# Altium PCB LPCB224R0__ASCII.PcbDoc
Units mm, origin at the board's own origin, x right, y up, seen from the top; angles counter-clockwise.
Board outline 139 x 166 mm, 4 copper layers (Top Layer, Internal Plane 1, Mid-Layer 1, Bottom Layer); 91 components, 73 nets, 403 pads, 4 vias.
Unrouted connection lines stored in the file: 212.
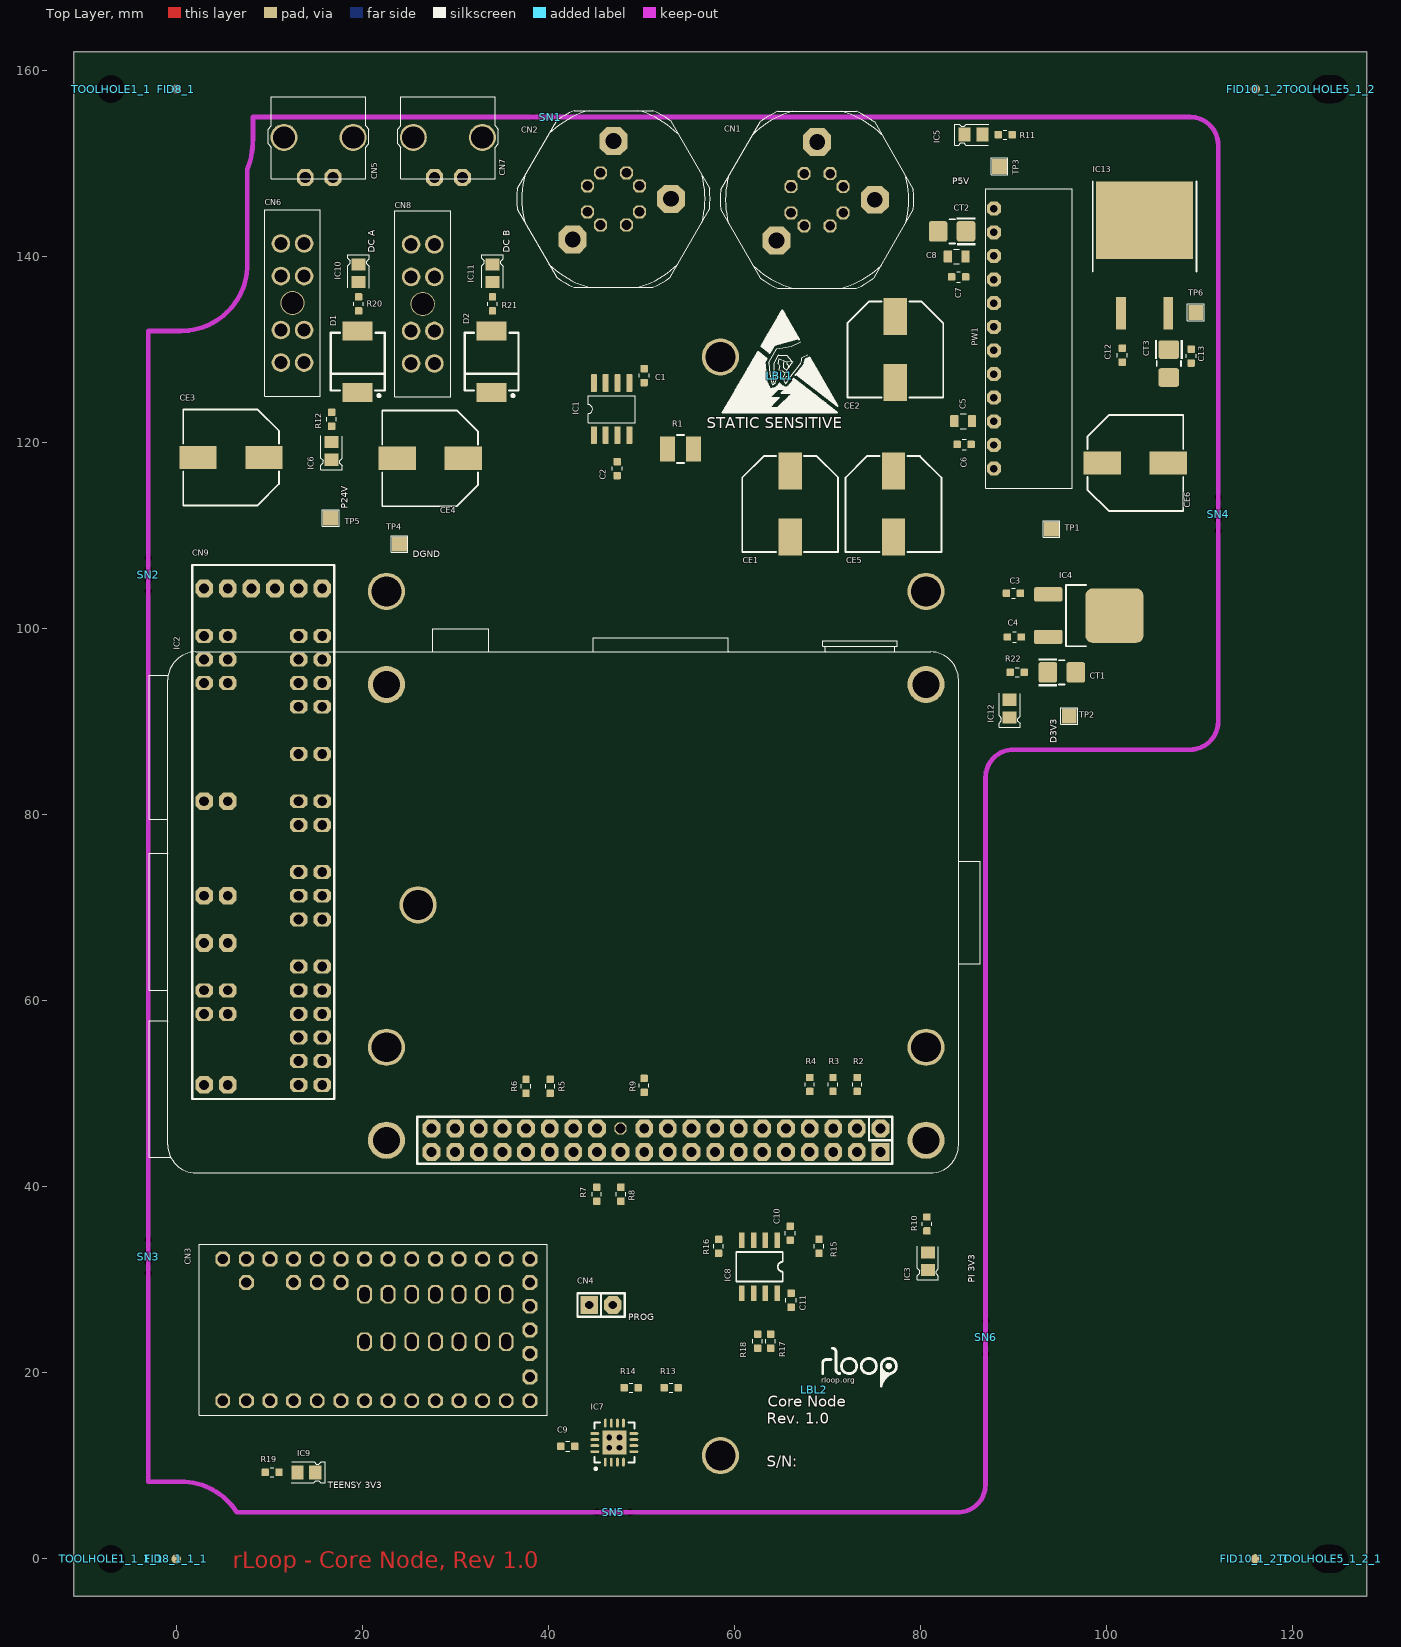
[diagram p0: Top Layer view]
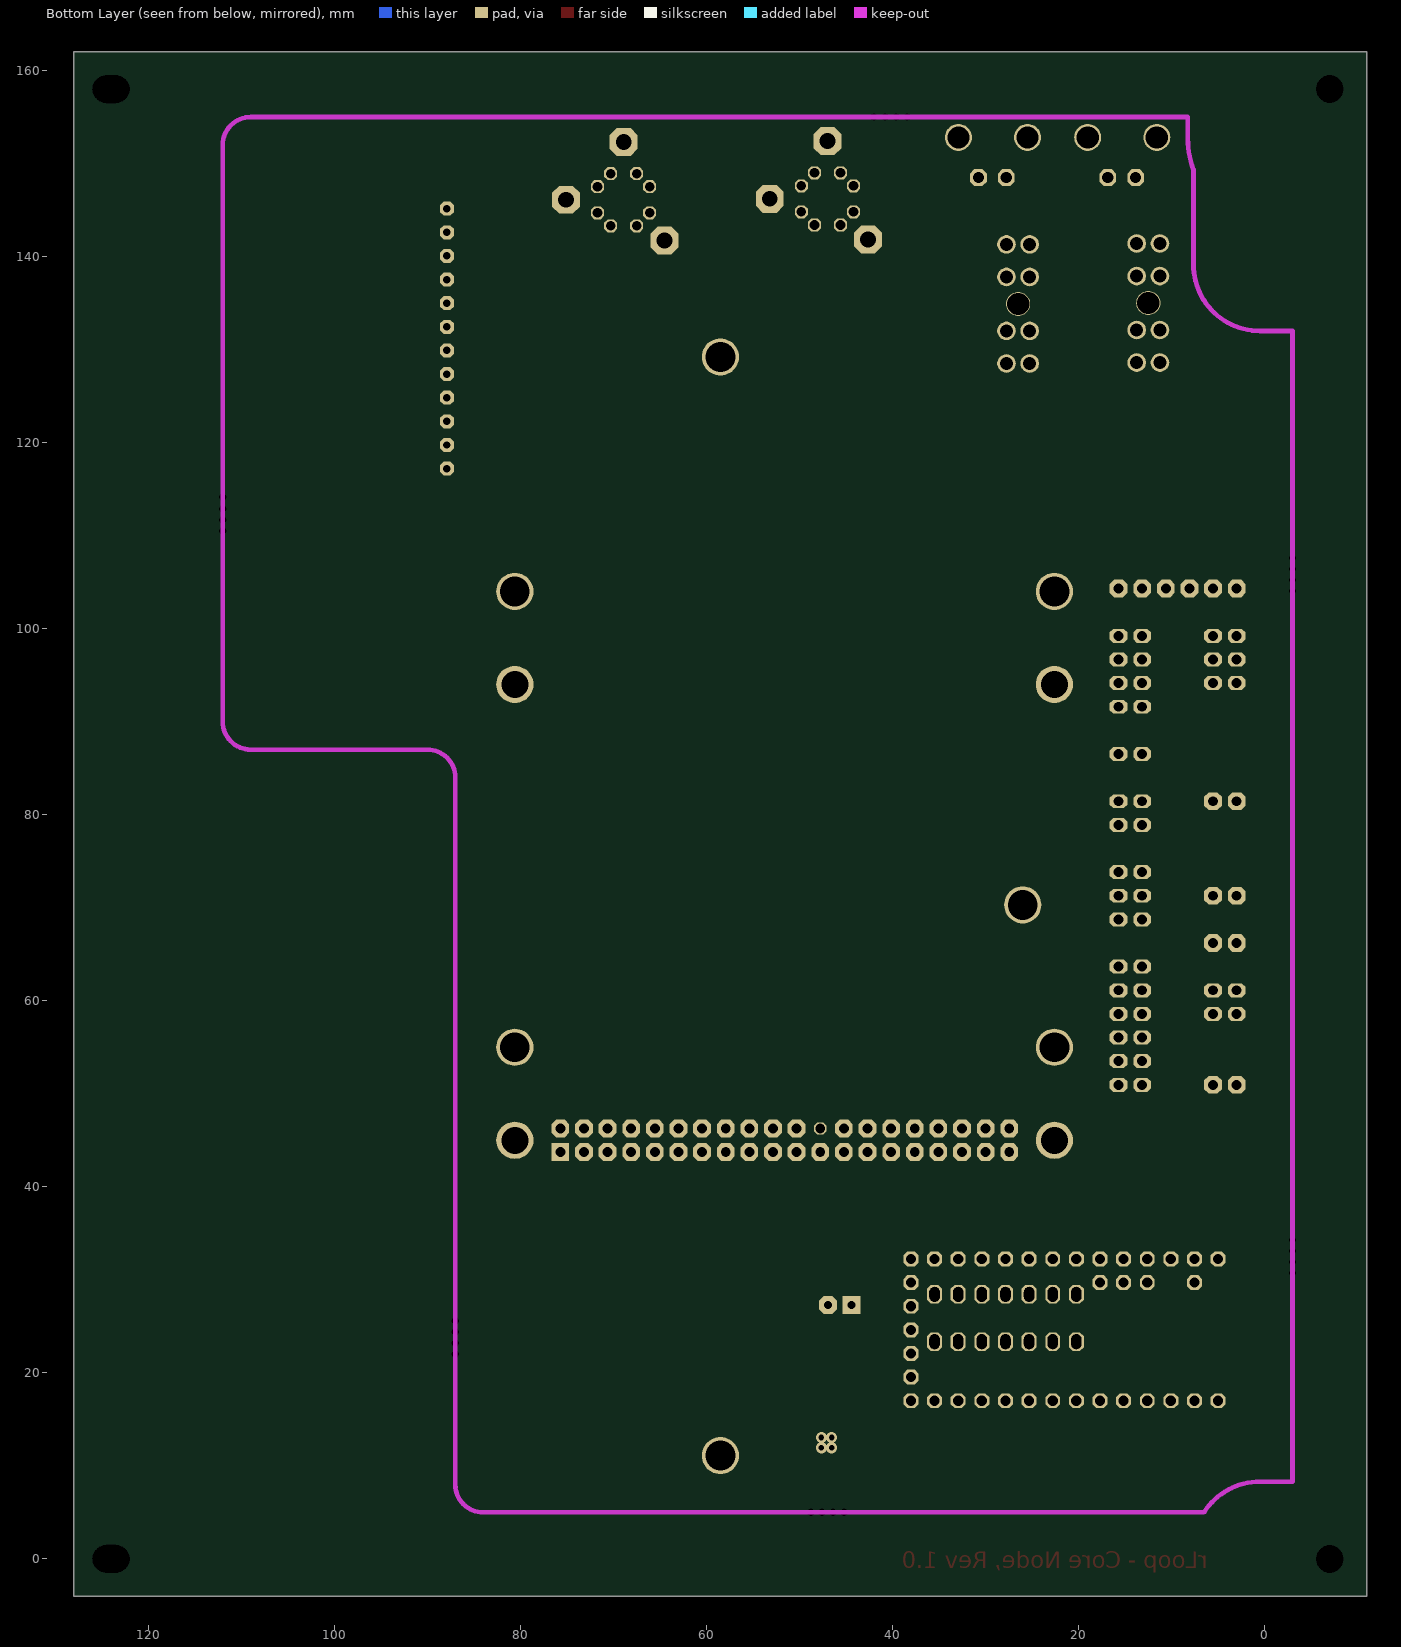
[diagram p1: Bottom Layer view, seen from below]
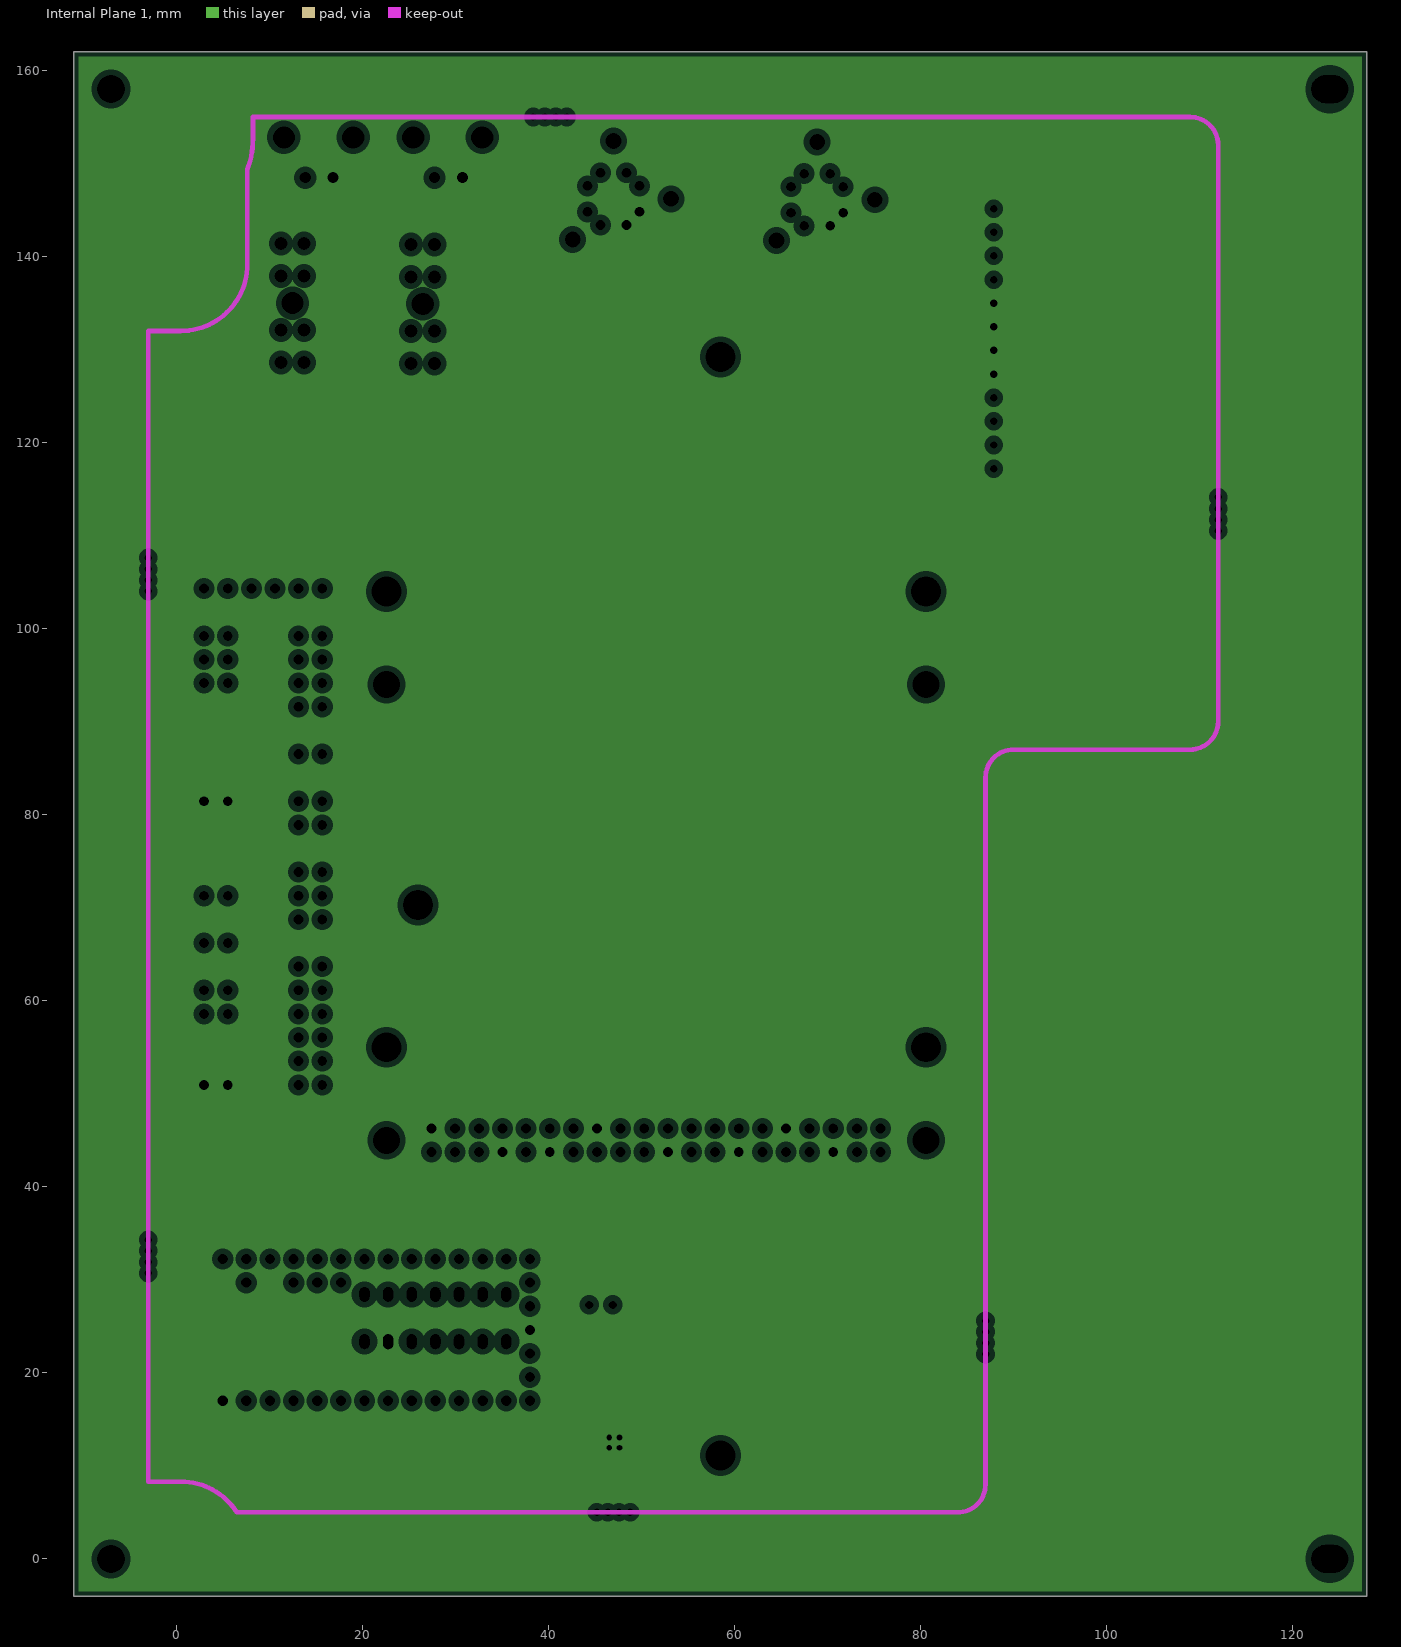
[diagram p2: Internal Plane 1, clearances drawn from the general rule]

## Layer stack, top to bottom
Top Layer: signal copper 0.0356
Dielectric: core 0.32, FR-4, Dk 4.8
Internal Plane 1: plane copper 0.0356, net DGND
Dielectric: prepreg 0.32, FR-4, Dk 4.8
Mid-Layer 1: signal copper 0.0356
Dielectric: core 0.32, FR-4, Dk 4.8
Bottom Layer: signal copper 0.0356

## Board outline
-11,-4 -11,162 128,162 128,-4

## Design rules (kind name [scope] priority, off if disabled: settings)
AssemblyTestPointUsage [All] p0: scope1count=1 scope1_0_kind=Board scope1_0_value=Board scope2count=1 scope2_0_kind=Board scope2_0_value=Board commentlength=0
AssemblyTestpoint [All] p0: scope1count=1 scope1_0_kind=Board scope1_0_value=Board scope2count=1 scope2_0_kind=Board scope2_0_value=Board commentlength=0
Clearance [All] p0: scope1count=1 scope1_0_kind=Board scope1_0_value=Board scope2count=1 scope2_0_kind=Board scope2_0_value=Board commentlength=0 gap=0.16
Clearance [All] p1: gap=0.16
ComponentClearance [All] p0: scope1count=1 scope1_0_kind=Board scope1_0_value=Board scope2count=1 scope2_0_kind=Board scope2_0_value=Board commentlength=0 gap=0.254 collisioncheckmode=3
DiffPairsRouting [All] p0: scope1count=1 scope1_0_kind=Board scope1_0_value=Board scope2count=1 scope2_0_kind=Board scope2_0_value=Board commentlength=0
FabricationTestPointUsage [All] p0: scope1count=1 scope1_0_kind=Board scope1_0_value=Board scope2count=1 scope2_0_kind=Board scope2_0_value=Board commentlength=0 valid=0 allowmultiple=FALSE
FabricationTestpoint [All] p0: scope1count=1 scope1_0_kind=Board scope1_0_value=Board scope2count=1 scope2_0_kind=Board scope2_0_value=Board commentlength=0 side=3 testpointundercomponent=TRUE minsize=1.016 maxsize=2.54 preferedsize=1.524 minholesize=0 maxholesize=1.016 preferedholesize=0.813 testpointgrid=0.025
FanoutControl Fanout_Default [All] p0: scope1count=1 scope1_0_kind=Board scope1_0_value=Board scope2count=1 scope2_0_kind=Board scope2_0_value=Board commentlength=30 // Fanout_Default (Default Rule)
FanoutControl Fanout_Small [All] p0 off: scope1count=1 scope1_0_kind=Board scope1_0_value=Board scope2count=1 scope2_0_kind=Board scope2_0_value=Board commentlength=84 // Protel DXP Scope 1 Expression Was: (CompPinCount < 5)   Fanout_Small (Default Rule)
FanoutControl Fanout_SOIC [All] p0 off: scope1count=1 scope1_0_kind=Board scope1_0_value=Board scope2count=1 scope2_0_kind=Board scope2_0_value=Board commentlength=71 // Protel DXP Scope 1 Expression Was: IsSOIC   Fanout_SOIC (Default Rule)
FanoutControl Fanout_LCC [All] p0 off: scope1count=1 scope1_0_kind=Board scope1_0_value=Board scope2count=1 scope2_0_kind=Board scope2_0_value=Board commentlength=69 // Protel DXP Scope 1 Expression Was: IsLCC   Fanout_LCC (Default Rule)
FanoutControl Fanout_BGA [All] p0 off: scope1count=1 scope1_0_kind=Board scope1_0_value=Board scope2count=1 scope2_0_kind=Board scope2_0_value=Board commentlength=69 // Protel DXP Scope 1 Expression Was: IsBGA   Fanout_BGA (Default Rule)
Height [All] p0: scope1count=1 scope1_0_kind=Board scope1_0_value=Board scope2count=1 scope2_0_kind=Board scope2_0_value=Board commentlength=0
HoleSize [All] p0: scope1count=1 scope1_0_kind=Board scope1_0_value=Board scope2count=1 scope2_0_kind=Board scope2_0_value=Board commentlength=0 absolutevalues=TRUE maxlimit=4 minlimit=0.025 maxpercent=80.000 minpercent=20.000
HoleSize [All] p1: absolutevalues=TRUE maxlimit=4 minlimit=0.025 maxpercent=80.000 minpercent=20.000
HoleToHoleClearance [All] p0: scope1count=1 scope1_0_kind=Board scope1_0_value=Board scope2count=1 scope2_0_kind=Board scope2_0_value=Board commentlength=0
LayerPairs [All] p0: scope1count=1 scope1_0_kind=Board scope1_0_value=Board scope2count=1 scope2_0_kind=Board scope2_0_value=Board commentlength=0 enforce=TRUE
MinimumSolderMaskSliver [All] p0 off: scope1count=1 scope1_0_kind=Board scope1_0_value=Board scope2count=1 scope2_0_kind=Board scope2_0_value=Board commentlength=0
MinimumSolderMaskSliver [All] p1 off: minsoldermaskwidth=0.1
NetAntennae [All] p0: scope1count=1 scope1_0_kind=Board scope1_0_value=Board scope2count=1 scope2_0_kind=Board scope2_0_value=Board commentlength=0
PasteMaskExpansion [All] p0: scope1count=1 scope1_0_kind=Board scope1_0_value=Board scope2count=1 scope2_0_kind=Board scope2_0_value=Board commentlength=0 expansion=0
PlaneClearance [All] p0: scope1count=1 scope1_0_kind=Board scope1_0_value=Board scope2count=1 scope2_0_kind=Board scope2_0_value=Board commentlength=0 clearance=0.6
PlaneClearance [All] p1: clearance=0.6
PlaneConnect [All] p0: scope1count=1 scope1_0_kind=Board scope1_0_value=Board scope2count=1 scope2_0_kind=Board scope2_0_value=Board commentlength=0 planeconnectstyle=Direct reliefexpansion=0.508 reliefentries=4 reliefconductorwidth=0.254 reliefairgap=0.254
PlaneConnect [All] p1: planeconnectstyle=Direct reliefexpansion=0.508 reliefentries=4 reliefconductorwidth=0.254 reliefairgap=0.254
PolygonConnect PolygonConnect_1 [All] p0: scope1count=1 scope1_0_kind=Board scope1_0_value=Board scope2count=1 scope2_0_kind=Board scope2_0_value=Board commentlength=0 connectstyle=Relief reliefconductorwidth=0.254 reliefentries=4 polygonreliefangle="90 Angle"
PolygonConnect [All] p0 off: scope1count=1 scope1_0_kind=Board scope1_0_value=Board scope2count=1 scope2_0_kind=Board scope2_0_value=Board commentlength=44 connectstyle=Direct reliefconductorwidth=0.254 reliefentries=4 polygonreliefangle="90 Angle" // Protel DXP Scope 1 Expression Was: isVia
PolygonConnect [isVia] p1: connectstyle=Direct reliefconductorwidth=0.254 reliefentries=4 polygonreliefangle="90 Angle" airgapwidth=0.254
PolygonConnect PolygonConnect_1 [All] p2: connectstyle=Relief reliefconductorwidth=0.254 reliefentries=4 polygonreliefangle="90 Angle" airgapwidth=0.254
RoomDefinition "LPCB224 - OVERVIEW" [All] p0: scope1count=1 scope1_0_kind=ComponentClass scope1_0_value="LPCB224 - OVERVIEW" scope2count=1 scope2_0_kind=Board scope2_0_value=Board commentlength=0 region_x1=0 region_y1=0 region_x2=20000000 region_y2=10000000 confinementstyle=ConfineIn
RoomDefinition "U_LPCB224 - PI" [All] p0: scope1count=1 scope1_0_kind=ComponentClass scope1_0_value="U_LPCB224 - PI" scope2count=1 scope2_0_kind=Board scope2_0_value=Board commentlength=0 region_x1=0 region_y1=0 region_x2=20000000 region_y2=10000000 confinementstyle=ConfineIn
RoomDefinition "U_LPCB224 - POWER INPUT" [All] p0: scope1count=1 scope1_0_kind=ComponentClass scope1_0_value="U_LPCB224 - POWER INPUT" scope2count=1 scope2_0_kind=Board scope2_0_value=Board commentlength=0 region_x1=0 region_y1=0 region_x2=20000000 region_y2=10000000 confinementstyle=ConfineIn
RoomDefinition "U_LPCB224 - CAN" [All] p0: scope1count=1 scope1_0_kind=ComponentClass scope1_0_value="U_LPCB224 - CAN" scope2count=1 scope2_0_kind=Board scope2_0_value=Board commentlength=0 region_x1=0 region_y1=0 region_x2=20000000 region_y2=10000000 confinementstyle=ConfineIn
RoomDefinition "U_LPCB224 - PSU" [All] p0: scope1count=1 scope1_0_kind=ComponentClass scope1_0_value="U_LPCB224 - PSU" scope2count=1 scope2_0_kind=Board scope2_0_value=Board commentlength=0 region_x1=0 region_y1=0 region_x2=20000000 region_y2=10000000 confinementstyle=ConfineIn
RoomDefinition "U_LPCB224 - TEENSY" [All] p0: scope1count=1 scope1_0_kind=ComponentClass scope1_0_value="U_LPCB224 - TEENSY" scope2count=1 scope2_0_kind=Board scope2_0_value=Board commentlength=0 region_x1=0 region_y1=0 region_x2=20000000 region_y2=10000000 confinementstyle=ConfineIn
RoomDefinition "U_LPCB224 - CORE CONNECTOR" [All] p0: scope1count=1 scope1_0_kind=ComponentClass scope1_0_value="U_LPCB224 - CORE CONNECTOR" scope2count=1 scope2_0_kind=Board scope2_0_value=Board commentlength=0 region_x1=0 region_y1=0 region_x2=20000000 region_y2=10000000 confinementstyle=ConfineIn
RoomDefinition "LPCB224 - OVERVIEW" [InComponentClass('LPCB224 - OVERVIEW')] p1: confinementstyle=ConfineIn formatcopy=TRUE lockcomponents=FALSE outline -79.611,-125.874 -28.811,-125.874 -28.811,-100.474 -79.611,-100.474
RoomDefinition "U_LPCB224 - CORE CONNECTOR" [InComponentClass('U_LPCB224 - CORE CONNECTOR')] p2: confinementstyle=ConfineIn formatcopy=TRUE lockcomponents=FALSE outline -79.611,-125.874 -28.811,-125.874 -28.811,-100.474 -79.611,-100.474
RoomDefinition "U_LPCB224 - TEENSY" [InComponentClass('U_LPCB224 - TEENSY')] p3: confinementstyle=ConfineIn formatcopy=TRUE lockcomponents=FALSE outline -79.611,-125.874 -28.811,-125.874 -28.811,-100.474 -79.611,-100.474
RoomDefinition "U_LPCB224 - PSU" [InComponentClass('U_LPCB224 - PSU')] p4: confinementstyle=ConfineIn formatcopy=TRUE lockcomponents=FALSE outline -79.611,-125.874 -28.811,-125.874 -28.811,-100.474 -79.611,-100.474
RoomDefinition "U_LPCB224 - PI" [InComponentClass('U_LPCB224 - PI')] p5: confinementstyle=ConfineIn formatcopy=TRUE lockcomponents=FALSE outline -79.611,-125.874 -28.811,-125.874 -28.811,-100.474 -79.611,-100.474
RoomDefinition "U_LPCB224 - POWER INPUT" [InComponentClass('U_LPCB224 - POWER INPUT')] p6: confinementstyle=ConfineIn formatcopy=TRUE lockcomponents=FALSE outline -79.611,-125.874 -28.811,-125.874 -28.811,-100.474 -79.611,-100.474
RoomDefinition "U_LPCB224 - CAN" [InComponentClass('U_LPCB224 - CAN')] p7: confinementstyle=ConfineIn formatcopy=TRUE lockcomponents=FALSE outline -79.611,-125.874 -28.811,-125.874 -28.811,-100.474 -79.611,-100.474
RoutingCorners [All] p0: scope1count=1 scope1_0_kind=Board scope1_0_value=Board scope2count=1 scope2_0_kind=Board scope2_0_value=Board commentlength=0 cornerstyle=45-Degree minsetback=2.54 maxsetback=2.54
RoutingLayers [All] p0: scope1count=1 scope1_0_kind=Board scope1_0_value=Board scope2count=1 scope2_0_kind=Board scope2_0_value=Board commentlength=0 top layer=Automatic mid layer 1=Automatic bottom layer=Automatic
RoutingPriority [All] p0: scope1count=1 scope1_0_kind=Board scope1_0_value=Board scope2count=1 scope2_0_kind=Board scope2_0_value=Board commentlength=0
RoutingTopology [All] p0: scope1count=1 scope1_0_kind=Board scope1_0_value=Board scope2count=1 scope2_0_kind=Board scope2_0_value=Board commentlength=0 topology=Shortest
RoutingVias [All] p0: scope1count=1 scope1_0_kind=Board scope1_0_value=Board scope2count=1 scope2_0_kind=Board scope2_0_value=Board commentlength=0 holewidth=0.6 width=1.2 viastyle="Through Hole" minholewidth=0.6 minwidth=1.2 maxholewidth=1 maxwidth=3
RoutingVias [All] p1: holewidth=0.6 width=1.2 viastyle="Through Hole" minholewidth=0.6 minwidth=1.2 maxholewidth=1 maxwidth=3
ShortCircuit [All] p0: scope1count=1 scope1_0_kind=Board scope1_0_value=Board scope2count=1 scope2_0_kind=Board scope2_0_value=Board commentlength=0 allowed=FALSE
SilkToSilkClearance [All] p0 off: scope1count=1 scope1_0_kind=Board scope1_0_value=Board scope2count=1 scope2_0_kind=Board scope2_0_value=Board commentlength=0
SilkToSilkClearance [All] p1 off: silktosilkclearance=0.1
SilkToSolderMaskClearance [All] p0 off: scope1count=1 scope1_0_kind=Board scope1_0_value=Board scope2count=1 scope2_0_kind=Board scope2_0_value=Board commentlength=44 // Protel DXP Scope 1 Expression Was: IsPad
SilkToSolderMaskClearance [IsPad] p1 off: minsilkscreentomaskgap=0.1 clearancetoexposedcopper=TRUE
SolderMaskExpansion [All] p0: scope1count=1 scope1_0_kind=Board scope1_0_value=Board scope2count=1 scope2_0_kind=Board scope2_0_value=Board commentlength=0 expansion=0.102
SolderMaskExpansion [All] p1: expansion=0.102
UnRoutedNet [All] p0: scope1count=1 scope1_0_kind=Board scope1_0_value=Board scope2count=1 scope2_0_kind=Board scope2_0_value=Board commentlength=0
Width [All] p0: scope1count=1 scope1_0_kind=Board scope1_0_value=Board scope2count=1 scope2_0_kind=Board scope2_0_value=Board commentlength=0 maxlimit=2 minlimit=0.254 preferedwidth=0.254
Width [All] p1: maxlimit=2 minlimit=0.254 preferedwidth=0.254
22 further rules are at their usual default settings.

## Classes and differential pairs
component class "U_LPCB224 - POWER INPUT": CE3 CE4 CN5 CN6 CN7 CN8 D1 D2 IC10 IC11 R20 R21
component class "U_LPCB224 - TEENSY": C9 C10 C11 CN3 CN4 IC7 IC8 IC9 R13 R14 R15 R16 R17 R18 R19
component class "U_LPCB224 - PSU": C3 C4 C5 C6 C7 C8 C12 C13 CE1 CE2 CE5 CE6 CT1 CT2 CT3 IC4 IC5 IC6 IC12 IC13 PW1 R11 R12 R22 TP1 TP2 TP3 TP4 TP5 TP6
component class "U_LPCB224 - PI": IC2 IC3 R2 R3 R4 R5 R6 R7 R8 R9 R10
component class "U_LPCB224 - CAN": C1 C2 CN1 CN2 IC1 R1
component class "U_LPCB224 - CORE CONNECTOR": CN9
component class "LPCB224 - OVERVIEW": LBL1 LBL2 SN1 SN2 SN3 SN4 SN5 SN6

## Components (designator, comment, footprint, x,y, rotation, side; value= is the part's Value field where it differs from the comment)
C1 "100n / 50V / 10% / SMD 0603" LFP011__CC1608-0603-IPC7351_B 50.3,127.205 r90 top
C2 "100n / 50V / 10% / SMD 0603" LFP011__CC1608-0603-IPC7351_B 47.4,117.205 r270 top
C3 "100n / 50V / 10% / SMD 0603" LFP011__CC1608-0603-IPC7351_B 90,103.805 r180 top
C4 "100n / 50V / 10% / SMD 0603" LFP011__CC1608-0603-IPC7351_B 90.1,99.105 r180 top
C5 "1uF / 50V / 10% / SMD 0805" LFP010__CC2012-0805-IPC7351_B 84.6,122.305 r180 top
C6 "100n / 50V / 10% / SMD 0603" LFP011__CC1608-0603-IPC7351_B 84.7,119.805 r180 top
C7 "100n / 50V / 10% / SMD 0603" LFP011__CC1608-0603-IPC7351_B 84.1,137.805 r180 top
C8 "1uF / 50V / 10% / SMD 0805" LFP010__CC2012-0805-IPC7351_B 83.9,140.005 r180 top
C9 "100n / 50V / 10% / SMD 0603" LFP011__CC1608-0603-IPC7351_B 42.1,12.105 r180 top
C10 "100n / 50V / 10% / SMD 0603" LFP011__CC1608-0603-IPC7351_B 66,35.005 r90 top
C11 "100n / 50V / 10% / SMD 0603" LFP011__CC1608-0603-IPC7351_B 66.1,27.805 r270 top
C12 "100n / 50V / 10% / SMD 0603" LFP011__CC1608-0603-IPC7351_B 101.7,129.4 r270 top
C13 "100n / 50V / 10% / SMD 0603" LFP011__CC1608-0603-IPC7351_B 109.1,129.3 r270 top
CE1 "330uF / 35V / 20% / SMD 10x10" LFP041__NICHICON_WT_10X10 66,113.405 r270 top
CE2 "330uF / 35V / 20% / SMD 10x10" LFP041__NICHICON_WT_10X10 77.3,130.005 r270 top
CE3 "330uF / 35V / 20% / SMD 10x10" LFP041__NICHICON_WT_10X10 5.9,118.405 r180 top
CE4 "330uF / 35V / 20% / SMD 10x10" LFP041__NICHICON_WT_10X10 27.3,118.305 r180 top
CE5 "330uF / 35V / 20% / SMD 10x10" LFP041__NICHICON_WT_10X10 77.1,113.405 r270 top
CE6 "330uF / 35V / 20% / SMD 10x10" LFP041__NICHICON_WT_10X10 103.1,117.8 r0 top
CN1 "2232331-1" 2232331-1 68.9,146.105 r0 top locked
CN2 "2232331-1" 2232331-1 47,146.205 r0 top locked
CN3 "TEENSY_V3.2" TEENSY_V3.2 5,17 r90 top locked
CN4 "HDR-2X1" HDR-2X1 44.4,27.3 r0 top
CN5 "1445054-2" 1445054-2 15.3,152.805 r180 top
CN6 "SI-H-FKS 30" SI-H-FKS-30 12.5,135.005 r90 top
CN7 "1445054-2" 1445054-2 29.2,152.805 r180 top
CN8 "SI-H-FKS 30" SI-H-FKS-30 26.5,134.905 r90 top
CN9 "RLOOP_NODE_CORE" RLOOP_NODE_CORE 3,104.305 r270 top locked
CT1 "22uF / 16V / 10% / SMD TC3528" LFP018__TC3528 95.2,95.305 r0 top
CT2 "22uF / 16V / 10% / SMD TC3528" LFP018__TC3528 83.4,142.705 r180 top
CT3 "22uF / 16V / 10% / SMD TC3528" LFP018__TC3528 106.7,128.5 r270 top
D1 "S3M-E3/57T" LFP040__DO-214AB 19.5,128.705 r90 top
D2 "S3M-E3/57T" LFP040__DO-214AB 33.9,128.705 r90 top
FID8_1 "FIDUCIAL" FIDTOP 0,158 r0 top
FID8_1_1_1 "FIDUCIAL" FIDTOP 0,0 r0 top
FID10_1_2 "FIDUCIAL" FIDTOP 116,158 r0 top
FID10_1_2_1 "FIDUCIAL" FIDTOP 116,0 r0 top
IC1 "MCP2562T-E/SN" LFP017__SO-G8/Y1.9 46.8,123.605 r0 top
IC2 "RASPBERRY_PI_B" RASPBERRY_PI_B 80.6,45 r180 top locked
IC3 "EL-17-21VGC/TR8" CR2012-0805-LED 80.8,32.005 r90 top
IC4 "NCV4274DT33RKG" LFP019__369A-13 98.3,101.405 r270 top
IC5 "EL-17-21VGC/TR8" CR2012-0805-LED 85.705,153.1 r0 top
IC6 "EL-17-21VGC/TR8" CR2012-0805-LED 16.7,119.105 r90 top
IC7 "TSYS01" LFP135__QFN65P400X400X80_HS-17M 47.1,12.5 r0 top
IC8 "ISO1540DR" LFP097__SOIC150-8 62.7,31.405 r180 top
IC9 "EL-17-21VGC/TR8" CR2012-0805-LED 14,9.305 r180 top
IC10 "EL-17-21VGC/TR8" CR2012-0805-LED 19.6,138.205 r270 top
IC11 "EL-17-21VGC/TR8" CR2012-0805-LED 34,138.205 r270 top
IC12 "EL-17-21VGC/TR8" CR2012-0805-LED 89.6,91.405 r90 top
IC13 "NCV8674DS120G" LFP082__D2PAK 104.1,138.4 r0 top
LBL1 "STATIC LABEL" STATIC_LABEL 64.9,127.2 r0 top
LBL2 "RLOOP_LOGO" RLOOP_LOGO 68.6,18.205 r0 top
PW1 "R-625.0P" R-625.0P 87.9,117.205 r90 top locked
R1 "121R / 0.33W / 1% / SMD 1210" LFP028__CR3225-1210 54.2,119.305 r0 top
R2 "10K / 0.1W / 1% / SMD 0603" LFP020__CR1608-0603-IPC7351_B 73.2,51 r270 top
R3 "10K / 0.1W / 1% / SMD 0603" LFP020__CR1608-0603-IPC7351_B 70.6,51 r270 top
R4 "10K / 0.1W / 1% / SMD 0603" LFP020__CR1608-0603-IPC7351_B 68.1,51 r270 top
R5 "10K / 0.1W / 1% / SMD 0603" LFP020__CR1608-0603-IPC7351_B 40.2,50.8 r270 top
R6 "10K / 0.1W / 1% / SMD 0603" LFP020__CR1608-0603-IPC7351_B 37.6,50.8 r270 top
R7 "10K / 0.1W / 1% / SMD 0603" LFP020__CR1608-0603-IPC7351_B 45.2,39.2 r90 top
R8 "10K / 0.1W / 1% / SMD 0603" LFP020__CR1608-0603-IPC7351_B 47.8,39.2 r90 top
R9 "10K / 0.1W / 1% / SMD 0603" LFP020__CR1608-0603-IPC7351_B 50.3,50.9 r270 top
R10 "2.2K / 0.1W / 1% / SMD 0603" LFP020__CR1608-0603-IPC7351_B 80.7,36.005 r90 top
R11 "2.2K / 0.1W / 1% / SMD 0603" LFP020__CR1608-0603-IPC7351_B 89.105,153.1 r0 top
R12 "2.2K / 0.1W / 1% / SMD 0603" LFP020__CR1608-0603-IPC7351_B 16.7,122.505 r90 top
R13 "2.2K / 0.1W / 1% / SMD 0603" LFP020__CR1608-0603-IPC7351_B 53.2,18.405 r0 top
R14 "2.2K / 0.1W / 1% / SMD 0603" LFP020__CR1608-0603-IPC7351_B 48.9,18.405 r180 top
R15 "2.2K / 0.1W / 1% / SMD 0603" LFP020__CR1608-0603-IPC7351_B 69.1,33.605 r90 top
R16 "2.2K / 0.1W / 1% / SMD 0603" LFP020__CR1608-0603-IPC7351_B 58.3,33.605 r90 top
R17 "2.2K / 0.1W / 1% / SMD 0603" LFP020__CR1608-0603-IPC7351_B 63.9,23.405 r270 top
R18 "2.2K / 0.1W / 1% / SMD 0603" LFP020__CR1608-0603-IPC7351_B 62.5,23.405 r270 top
R19 "2.2K / 0.1W / 1% / SMD 0603" LFP020__CR1608-0603-IPC7351_B 10.3,9.305 r180 top
R20 "2.2K / 0.1W / 1% / SMD 0603" LFP020__CR1608-0603-IPC7351_B 19.6,134.905 r270 top
R21 "2.2K / 0.1W / 1% / SMD 0603" LFP020__CR1608-0603-IPC7351_B 34,134.905 r270 top
R22 "2.2K / 0.1W / 1% / SMD 0603" LFP020__CR1608-0603-IPC7351_B 90.4,95.305 r0 top
SN1 "PCB_SNAPOUT" SNAPOUT_NEW 42,155 r180 top
SN2 "PCB_SNAPOUT" SNAPOUT_NEW -3,104.005 r90 top
SN3 "PCB_SNAPOUT" SNAPOUT_NEW -3,30.705 r90 top
SN4 "PCB_SNAPOUT" SNAPOUT_NEW 112,110.505 r90 top
SN5 "PCB_SNAPOUT" SNAPOUT_NEW 48.8,5 r180 top
SN6 "PCB_SNAPOUT" SNAPOUT_NEW 87,22.005 r90 top
TOOLHOLE1_1 "Comment" TOOL-1#1 -7,158 r0 top
TOOLHOLE1_1_1_1 "Comment" TOOL-1#1 -7,0 r0 top
TOOLHOLE5_1_2 "Comment" TOOL-1#2 124,158 r0 top
TOOLHOLE5_1_2_1 "Comment" TOOL-1#2 124,0 r0 top
TP1 "SMD_TP" SMD-TP 94.1,110.7 r90 top
TP2 "SMD_TP" SMD-TP 96,90.605 r0 top
TP3 "SMD_TP" SMD-TP 88.505,149.7 r0 top
TP4 "SMD_TP" SMD-TP 24,109.105 r90 top
TP5 "SMD_TP" SMD-TP 16.6,111.905 r90 top
TP6 "SMD_TP" SMD-TP 109.6,134 r90 top

## Footprints (in the part's own frame and the unit in brackets; to place one, negate y for a bottom-side part, rotate by r counter-clockwise, add the part's x,y. Pads: shape width x height; smd on the part's side, far side on the other; paste and mask are expansions set on the pad)
1445054-2 [mm]
  oct 1.8x1.8 hole 1.2: 1(1.435,4.32) 2(-1.565,4.32)
  round 2.9 hole 2.4: B(-3.715,0) B(3.715,0)
  silkscreen extent -5.4,-4.36 5.4,4.46
2232331-1 [mm]
  oct 1.4x1.4 hole 1.05: 1(-1.4,-2.8) 2(-2.8,-1.4) 3(-2.8,1.4) 4(-1.4,2.8) 5(1.4,2.8) 6(2.8,1.4) 7(2.8,-1.4) 8(1.4,-2.8)
  oct 3x3 hole 1.7: B(-4.38,-4.38) B(0,6.2) B(6.2,0)
  silkscreen extent -10.41,-9.51 10.39,9.49
CR2012-0805-LED [mm]
  rect 1.3x1.5 smd: A(0.95,0) K(-0.95,0)
  silkscreen extent -2.01,-1.14 1.63,1.14
FIDTOP [mil]
  round 40 smd mask+39.37: 1(0,0)
HDR-2X1 [mil] "2-Pin connector"
  rect 75x75 hole 35: 1(0,0)
  oct 75x75 hole 35: 2(100,0)
  silkscreen extent -50,-50 150,50
LFP010__CC2012-0805-IPC7351_B [mm]
  rrect25% 0.9x1.3 smd paste-0.01: 1(-0.95,0) 2(0.95,0)
  silkscreen extent -0.3,-0.8 0.3,0.8
LFP011__CC1608-0603-IPC7351_B [mm]
  rrect25% 0.8x0.8 smd: 1(-0.75,0) 2(0.75,0)
  silkscreen extent -0.2,-0.55 0.2,0.55
LFP017__SO-G8/Y1.9 [mm]
  rrect25% 0.65x1.9 smd: 1(-1.905,-2.8) 2(-0.635,-2.8) 3(0.635,-2.8) 4(1.905,-2.8) 5(1.905,2.8) 6(0.635,2.8) 7(-0.635,2.8) 8(-1.905,2.8)
  silkscreen extent -2.52,-1.45 2.52,1.45
LFP018__TC3528 [mm]
  rrect25% 2x2.2 smd: 1(-1.5,0) 2(1.5,0)
  silkscreen extent -2.51,-1.5 0.3,1.5
LFP019__369A-13 [mil]
  rrect25% 60x120 smd: 1(-90,-179.49) 3(90,-179.49)
  rrect25% 230x245 smd paste-196.85: 4(0,100.75)
  silkscreen extent -130,-104 130,-19
LFP020__CR1608-0603-IPC7351_B [mm]
  rrect25% 0.8x0.8 smd: 1(-0.75,0) 2(0.75,0)
  silkscreen extent -0.2,-0.5 0.2,0.5
LFP028__CR3225-1210 [mm]
  rect 1.6x2.7 smd: 1(-1.4,0) 2(1.4,0)
  silkscreen extent -0.4,-1.5 0.4,1.5
LFP040__DO-214AB [mm]
  rect 2.032x3.2 smd: 1(-3.3,0) 2(3.3,0)
  silkscreen extent -3.8,-2.9 3.1,2.9
LFP041__NICHICON_WT_10X10 [mm]
  rect 4x2.5 smd: 1(-3.55,0) 2(3.55,0)
  silkscreen extent -5.15,-5.15 5.15,5.15
LFP082__D2PAK [mm] "D2-PAK/TO-263-AB; 3 Leads (1 Cropped); Body 15.5 (inc. leads) x 10.5 mm (LxW max)"
  rect 1.05x3.5 smd: 1(-2.54,-4.5) 3(2.54,-4.5)
  rect 10.4x8.38 smd paste-1: 2(0,5.5)
  silkscreen extent -5.58,0 5.58,9.7
LFP097__SOIC150-8 [mm] "Small Outline, Plastic, Narrow; 8 Leads; Body Width 3.8 mm; Pitch 1.27 mm"
  rrect10% 0.6x1.7 smd paste-0.05: 1(-1.905,-2.85) 2(-0.635,-2.85) 3(0.635,-2.85) 4(1.905,-2.85) 5(1.905,2.85) 6(0.635,2.85) 7(-0.635,2.85) 8(-1.905,2.85)
  silkscreen extent -2.5,-1.6 2.5,1.6
LFP135__QFN65P400X400X80_HS-17M [mm] "QFN, 16-Leads, Body 4.00x4.00mm, Pitch 0.65mm, Thermal Pad 2.60x2.60mm, IPC Low Density"
  oval 0.3x0.95 smd paste-0.05: 1(-0.975,-2.1) 2(-0.325,-2.1) 3(0.325,-2.1) 4(0.975,-2.1) 9(0.975,2.1) 10(0.325,2.1) 11(-0.325,2.1) 12(-0.975,2.1)
  oval 0.95x0.3 smd paste-0.05: 5(2.1,-0.975) 6(2.1,-0.325) 7(2.1,0.325) 8(2.1,0.975) 13(-2.1,0.975) 14(-2.1,0.325) 15(-2.1,-0.325) 16(-2.1,-0.975)
  rect 2.6x2.6 smd paste-5: PAD(0,0)
  silkscreen extent -2.15,-2.92 2.15,2.15
R-625.0P [mm]
  oct 1.5x1.5 hole 0.8: 1(0,0) 2(2.54,0) 3(5.08,0) 4(7.62,0) 5(10.16,0) 6(12.7,0) 7(15.24,0) 8(17.78,0) 9(20.32,0) 10(22.86,0) 11(25.4,0) 12(27.94,0)
  silkscreen extent -2.13,-8.4 30.07,0.9
RASPBERRY_PI_B [mm]
  oct 1.905x1.905 hole 1.067: 1(4.89,-1.27) 3(7.43,-1.27) 4(7.43,1.27) 5(9.97,-1.27) 6(9.97,1.27) 7(12.51,-1.27) 8(12.51,1.27) 9(15.05,-1.27) 10(15.05,1.27) 11(17.59,-1.27) 12(17.59,1.27) 13(20.13,-1.27) 14(20.13,1.27) 15(22.67,-1.27) 16(22.67,1.27) 17(25.21,-1.27) 18(25.21,1.27) 19(27.75,-1.27) 20(27.75,1.27) 21(30.29,-1.27) 22(30.29,1.27) 24(32.83,1.27) 25(35.37,-1.27) 26(35.37,1.27) 27(37.91,-1.27) 28(37.91,1.27) 29(40.45,-1.27) 30(40.45,1.27) 31(42.99,-1.27) 32(42.99,1.27) 33(45.53,-1.27) 34(45.53,1.27) 35(48.07,-1.27) 36(48.07,1.27) 37(50.61,-1.27) 38(50.61,1.27) 39(53.15,-1.27) 40(53.15,1.27)
  rect 1.905x1.905 hole 1.067: 2(4.89,1.27)
  oct 1.3x1.3 hole 1.067: 23(32.83,-1.27)
  round 4 hole 2.9: B(0,0) B(0,-49) B(58,0) B(58,-49)
  silkscreen extent -5.83,-55 83.5,3.5
RLOOP_LOGO [mm]
  silkscreen extent 0.89,0.39 8.82,4.45
RLOOP_NODE_CORE [mil]
  oct 59.06x75 hole 42: A10(200,0) A11(200,100) A12(300,0) A13(300,100) A14(400,0) AGND(400,100) ID1(200,400) ID2(200,500) ID3(300,400) ID4(500,500) ID5(500,400) ID6(400,500) ID7(400,400) ID8(300,500) SCL(700,500) SDA(700,400) T0(900,400) T1(900,500) T2(1000,400) T5(1000,500) T6(1200,400) T7(1200,500) T8(1300,400) T9(1300,500) T10(1400,400) T11(1400,500) T14(1600,400) T15(1600,500) T16(1700,400) T17(1700,500) T20(1800,400) T21(1800,500) T22(1900,400) T23(1900,500) T24(2000,400) T25(2000,500) T26(2100,400) T27(2100,500) T28(1700,0) T31(1700,100) T32(1800,0) T33(1800,100)
  oct 75x75 hole 42: D3V31(1300,0) D3V32(1300,100) D12V1(0,300) D12V2(0,200) GND1(2100,100) GND2(2100,0) GND3(900,100) GND4(900,0) P5V1(0,0) P5V2(0,100) P24V1(0,400) P24V2(0,500) T12(1500,0) T13(1500,100)
  silkscreen extent -100,-50 2160,550
SI-H-FKS-30 [mm] "Connector, Blade Fuse Holder, 5mm Terminals, 30A Max, PTH"
  round 2 hole 1.4: 1(2.9,-1.25) 1(2.9,1.25) 1(6.4,-1.25) 1(6.4,1.25) 2(-6.4,-1.25) 2(-6.4,1.25) 2(-2.9,-1.25) 2(-2.9,1.25)
  round 2.6 hole 2.4: B(0,0)
  silkscreen extent -10,-3 10,3
SMD-TP [mm]
  rect 1.6x1.6 smd paste-2: 1(0,0)
  silkscreen extent -0.9,-0.9 0.9,0.9
SNAPOUT_NEW [mm]
  round 0.4 hole 0.8 unplated: 0(0,0) 0(1.2,0) 0(2.4,0) 0(3.6,0)
STATIC_LABEL [mm]
  silkscreen extent -6.16,-3.95 6.18,7.02
TEENSY_V3.2 [mm]
  oct 1.6x1.6 hole 1.1: 0(0,-2.54) 1(0,-5.08) 2(0,-7.62) 3(0,-10.16) 3V3_1(15.24,-5.08) 3V3_2(5.08,-33.02) 4(0,-12.7) 5(0,-15.24) 6(0,-17.78) 7(0,-20.32) 8(0,-22.86) 9(0,-25.4) 10(0,-27.94) 11(0,-30.48) 12(0,-33.02) 13(15.24,-33.02) 14(15.24,-30.48) 15(15.24,-27.94) 16(15.24,-25.4) 17(15.24,-22.86) 18(15.24,-20.32) 19(15.24,-17.78) 20(15.24,-15.24) 21(15.24,-12.7) 22(15.24,-10.16) 23(15.24,-7.62) A10(12.7,-10.16) A11(12.7,-12.7) A14(12.7,-33.02) AGND(15.24,-2.54) AREF(12.7,-7.62) GND1(0,0) GND3(7.62,-33.02) PROG(10.16,-33.02) VBATT(2.54,-33.02) VIN(15.24,0) VUSB(12.7,-2.54)
  oct 2x1.6 hole 1.1 slot 1.6 at 0 deg: 3V3_3(11.43,-17.78) 24(6.35,-20.32) 25(6.35,-22.86) 26(6.35,-25.4) 27(6.35,-27.94) 28(6.35,-30.48) 29(11.43,-30.48) 30(11.43,-27.94) 31(11.43,-25.4) 32(11.43,-22.86) 33(11.43,-20.32) A12(6.35,-15.24) A13(11.43,-15.24) GND2(6.35,-17.78)
  silkscreen extent -1.58,-34.9 16.82,2.54
TOOL-1#1 [mm]
  round 2.54 hole 3 unplated: TOOL(0,0)
TOOL-1#2 [mm]
  round 0.076 hole 3 slot 4 at 0 deg unplated: TOOL1(0,0)

## Part data
C1 C2 C3 C4 C6 C7 C9 C10 C11 C12 C13: "Capacitor, Ceramic Chip, 100nF (0.1uF), 50V, 5%, SMD 0603 [LCA016]"
C5 C8: "Capacitor, Ceramic Chip, 1uF, 50V, SMD 0805 [LCA098]"
CE1 CE2 CE3 CE4 CE5 CE6: "Capacitor, Aluminum Electrolytic, 330uF, 35V, 20%, SMD (10mm x 10mm) [LCA071]"
CN1 CN2: "Connector, M12 8 Way, PCB Mount"
CN4: "Header, 2.54mm (0.1in), 2 Pins x 1 Row (40 Per Row In Strip)"
CN5 CN7: "Connector, MATE-N-LOK, Header, 2 Way, PTH"
CN6 CN8: "Connector, Blade Fuse Holder, 5mm Terminals, 30A Max, PTH"
CN9: "rLoop Node Core Connector"
CT1 CT2 CT3: "Capacitor, Tantalum, 22uF, 16V, 10%, SMD TC3528 (BCASE) [LCA039]"
D1 D2: "Diode, General Purpose Rectifier, 3A, 200V, SMD DO-214AB [LIC189]"
IC1: "IC, High Speed CAN Transceiver, SMD SOIC8 [LIC522]"
IC2: "Raspberry Pi Model B"
IC3 IC5 IC6 IC9 IC10 IC11 IC12: "LED, SMD, 0805 Green [LIC016]"
IC4: "IC, Voltage Regulator, 400mA, 3.3V LDO, SMD DPAK [LIC233]"
IC7: "IC, Digital Temp Sensor, SMD QFN16 [LIC556]"
IC8: "IC, Digital Isolator for I2C, SMD SOIC8"
IC13: "IC, Voltage Regulator, 0.35A, 12V, SMD D2PAK [LIC294]"
PW1: "Non Isolated DC/DC Module"
R1: "Resistor, Ceramic Chip, 121R, 0.33W, 1%, SMD 1210 [LRE077]"
R2 R3 R4 R5 R6 R7 R8 R9: "Resistor, Ceramic Chip, 10K, 0.1W, 1%, SMD 0603 [LRE030]"
R10 R11 R12 R13 R14 R15 R16 R17 R18 R19 R20 R21 R22: "Resistor, Ceramic Chip, 2.2K, 0.1W, 1%, SMD 0603 [LRE027]"
TP1 TP2 TP3 TP4 TP5 TP6: "SMD Test Point"

## Free pads (board coordinates)
  round 4 hole 3.2: B(22.6,55) B(22.6,104) B(26,70.305) B(58.5,11.105) B(58.5,129.205) B(80.6,55) B(80.6,104)

## Via types
v1: diameter 1.2, hole 0.6, Top Layer to Bottom Layer, 4 vias

## Nets (pads, with @x,y where several pads share a name; then routed paths per layer and width w, separated by ;. In a path a pad name is that pad's centre, name@x,y a point inside that pad or via, vN(x,y) a via of type N, cw(c..) or ccw(c..) an arc to the next point about the centre after c; other vN are vias at no path point)
AGND: CN3.AGND CN9.AGND
CAN_H: CN1.1 CN2.1 IC1.7 R1.1
CAN_L: CN1.2 CN2.2 IC1.6 R1.2
D3V3: C1.1 C4.1 CN9.D3V31 CN9.D3V32 CT1.1 IC1.5 IC4.3 R22.2 TP2.1
D12V: C13.1 CN9.D12V1 CN9.D12V2 CT3.1 IC13.3 TP6.1
DC_A: CN5.1 CN6.1
DC_B: CN7.1 CN8.1
DGND: C1.2 C2.2 C3.2 C4.2 C5.2 C6.2 C7.2 C8.2 C9.2 C10.2 C11.2 C12.2 C13.2 CE1.2 CE2.2 CE3.2 CE4.2 CE5.2 CE6.2 CN1.7 CN1.8 CN2.7 CN2.8 CN3.GND1 CN3.GND2 CN3.GND3 CN5.2 CN7.2 CN9.GND1 CN9.GND2 CN9.GND3 CN9.GND4 CT1.2 CT2.2 CT3.2 IC1.2 IC1.8 IC2.6 IC2.9 IC2.14 IC2.20 IC2.25 IC2.30 IC2.34 IC2.39 IC3.K IC4.4 IC5.K IC6.K IC7.1 IC7.2 IC7.PAD IC8.4 IC8.5 IC9.K IC10.K IC11.K IC12.K IC13.2 PW1.5 PW1.6 PW1.7 PW1.8 TP4.1
  other v1: 46.55,11.95 47.65,11.95 46.55,13.05 47.65,13.05
NetCN3_PROG: CN3.PROG CN4.1
NetCN6_2: CN6.2 D1.2 R20.2
NetCN8_2: CN8.2 D2.2 R21.2
NetIC3_A: IC3.A R10.1
NetIC5_A: IC5.A R11.1
NetIC6_A: IC6.A R12.1
NetIC7_10: IC7.10 IC7.11
NetIC9_A: IC9.A R19.1
NetIC10_A: IC10.A R20.1
NetIC11_A: IC11.A R21.1
NetIC12_A: IC12.A R22.1
P5V: C2.1 C3.1 C7.1 C8.1 CE1.1 CE2.1 CN3.VIN CN9.P5V1 CN9.P5V2 CT2.1 IC1.3 IC2.2 IC2.4 IC4.1 PW1.9 PW1.10 PW1.11 R11.2 TP1.1 TP3.1
P24V: C5.1 C6.1 C12.1 CE3.1 CE4.1 CE5.1 CE6.1 CN9.P24V1 CN9.P24V2 D1.1 D2.1 IC13.1 PW1.2 PW1.3 PW1.4 R12.2 TP5.1
PI_D3V3: C10.1 IC2.1 IC2.17 IC8.1 R2.1 R3.1 R4.1 R5.1 R6.1 R7.1 R8.1 R9.1 R10.2 R15.2 R16.2
PI_ID1: CN9.ID1 IC2.3 R2.2
PI_ID2: CN9.ID2 IC2.5 R3.2
PI_ID3: CN9.ID3 IC2.7 R4.2
PI_ID4: CN9.ID4 IC2.29 R5.2
PI_ID5: CN9.ID5 IC2.31 R6.2
PI_ID6: CN9.ID6 IC2.26 R7.2
PI_ID7: CN9.ID7 IC2.24 R8.2
PI_ID8: CN9.ID8 IC2.21 R9.2
PI_SCL: IC2.35 IC8.3 R16.1
PI_SDA: IC2.12 IC8.2 R15.1
T_D3V3: C9.1 C11.1 CN3.3V3_1 CN3.3V3_2 CN3.3V3_3 IC7.15 IC7.16 IC8.8 R13.2 R14.2 R17.2 R18.2 R19.2
TEENSY_A10: CN3.A10 CN9.A10
TEENSY_A11: CN3.A11 CN9.A11
TEENSY_A12: CN3.A12 CN9.A12
TEENSY_A13: CN3.A13 CN9.A13
TEENSY_A14: CN3.A14 CN9.A14
TEENSY_CAN_RX: CN3.4 IC1.4
TEENSY_CAN_TX: CN3.3 IC1.1
TEENSY_PROG: CN4.2 IC2.19
TEENSY_SCL: CN3.29 CN9.SCL IC7.3 R13.1
TEENSY_SCL1: CN3.19 IC8.6 R18.1
TEENSY_SDA: CN3.30 CN9.SDA IC7.4 R14.1
TEENSY_SDA1: CN3.18 IC8.7 R17.1
TEENSY_T0: CN3.0 CN9.T0
TEENSY_T1: CN3.1 CN9.T1
TEENSY_T2: CN3.2 CN9.T2
TEENSY_T5: CN3.5 CN9.T5
TEENSY_T6: CN3.6 CN9.T6
TEENSY_T7: CN3.7 CN9.T7
TEENSY_T8: CN3.8 CN9.T8
TEENSY_T9: CN3.9 CN9.T9
TEENSY_T10: CN3.10 CN9.T10
TEENSY_T11: CN3.11 CN9.T11
TEENSY_T12: CN3.12 CN9.T12
TEENSY_T13: CN3.13 CN9.T13
TEENSY_T14: CN3.14 CN9.T14
TEENSY_T15: CN3.15 CN9.T15
TEENSY_T16: CN3.16 CN9.T16
TEENSY_T17: CN3.17 CN9.T17
TEENSY_T20: CN3.20 CN9.T20
TEENSY_T21: CN3.21 CN9.T21
TEENSY_T22: CN3.22 CN9.T22
TEENSY_T23: CN3.23 CN9.T23
TEENSY_T24: CN3.24 CN9.T24
TEENSY_T25: CN3.25 CN9.T25
TEENSY_T26: CN3.26 CN9.T26
TEENSY_T27: CN3.27 CN9.T27
TEENSY_T28: CN3.28 CN9.T28
TEENSY_T31: CN3.31 CN9.T31
TEENSY_T32: CN3.32 CN9.T32
TEENSY_T33: CN3.33 CN9.T33
pads on no net: CN1.3 CN1.4 CN1.5 CN1.6 CN1.B CN2.3 CN2.4 CN2.5 CN2.6 CN2.B CN3.AREF CN3.VBATT CN3.VUSB CN5.B CN6.B CN7.B CN8.B FID8_1.1 FID8_1_1_1.1 FID10_1_2.1 FID10_1_2_1.1 IC2.8 IC2.10 IC2.11 IC2.13 IC2.15 IC2.16 IC2.18 IC2.22 IC2.23 IC2.27 IC2.28 IC2.32 IC2.33 IC2.36 IC2.37 IC2.38 IC2.40 IC2.B IC7.5 IC7.6 IC7.7 IC7.8 IC7.9 IC7.12 IC7.13 IC7.14 PW1.1 PW1.12 SN1.0 SN2.0 SN3.0 SN4.0 SN5.0 SN6.0 TOOLHOLE1_1.TOOL TOOLHOLE1_1_1_1.TOOL TOOLHOLE5_1_2.TOOL1 TOOLHOLE5_1_2_1.TOOL1

## Polygon pours and split planes (outlines as drawn)
DGND on Internal Plane 1 (split plane): 127.49,-3.49 -10.49,-3.49 -10.49,161.49 127.49,161.49

## Keep-outs
Keep-Out Layer:
  lines w0.5: -3,8.305 0.5,8.305 cw(c0.5,1.152) 6.529,5 84,5 ccw(c84,8) 87,8 87,84 cw(c90,84) 90,87 109,87 ccw(c109,90) 112,90 112,152 ccw(c109,152) 109,155 8.252,155 8.252,152.652 cw(c-1,152.652) 7.652,149.375 7.652,139.152 cw(c0.5,139.152) 0.5,132 -3,132 -3,8.305

## Other copper
Top Layer:
  text "rLoop - Core Node, Rev 1.0" at 6.1,-1.6 h3
Internal Plane 1 (plane layer: these items are gaps in the copper):
  the board outline again, w1.016

## Silkscreen, mask and mechanical layers (free items; w line width, h text height)
Top Overlay:
  text "P5V" at 83.405,147.5 h1.2
  text "DC A" at 21.6,140.4 h1.2 r90
  text "DC B" at 36.1,140.405 h1.2 r90
  text "P24V" at 18.7,112.905 h1.2 r90
  text "DGND" at 25.4,107.4 h1.2
  text "D3V3" at 94.9,87.705 h1.2 r90
  text "PI 3V3" at 86.1,29.7 h1.2 r90
  text "PROG" at 48.6,25.405 h1.2
  text "Core Node" at 63.6,15.9 h2
  text "Rev. 1.0" at 63.5,14.1 h2
  text "S/N:" at 63.5,9.5 h2
  text "TEENSY 3V3" at 16.3,7.305 h1.2
Mechanical 1:
  lines w0.1: 112,90 112,152 ; -11,-4 -11,162 128,162 128,-4 -11,-4
  lines w0.127: 112,90 cw(c109,90) 109,87 90,87 ccw(c90,84) 87,84 87,8 cw(c84,8) 84,5 6.53,5 ccw(c0.5,1.152) 0.5,8.305 -3,8.305 -3,132 0.5,132 ccw(c0.5,139.152) 7.652,139.152 7.652,149.375 ccw(c-1,152.652) 8.252,152.652 8.252,155 109,155 cw(c109,152) 112,152
Mechanical 3:
  lines w2.4: -4.2,7.105 0.5,7.105 ; -4.2,7.2 -4.2,28.8 ; -4.2,36 -4.2,102 ; -4.2,109.2 -4.2,133.2 0.5,133.2 ; 0.5,7.104 cw(c0.5,1.152) 5.85,3.761 ; 0.5,133.2 ccw(c0.5,139.152) 6.452,139.152 6.452,149.575 ; 5.9,3.9 6,3.8 43.2,3.8 ; 6.53,149.799 ccw(c-1.005,152.653) 7.052,152.653 7.052,156.2 37.052,156.2 ; 43.052,156.2 109,156.2 cw(c109,152) 113.2,152 113.2,116 ; 50.4,3.8 84,3.8 ccw(c84,8) 88.2,8 88.2,20 ; 88.2,27.2 88.2,84 cw(c90,84) 90,85.8 109,85.8 ccw(c109,90) 113.2,90 113.2,108.8

## Text inside footprints (layer, text, board x,y; h text height)
LBL1: Top Overlay "STATIC SENSITIVE" at 57.026,121.104 h2
LBL2: Top Overlay "rloop.org" at 69.35,18.705 h1